# Altium PCB Upper.PcbDoc
Units mm, origin at the board's own origin, x right, y up, seen from the top; angles counter-clockwise.
Board outline 50 x 40 mm, 4 copper layers (Top Layer, GND02, PWR03, Bottom Layer), stack 0.603 mm thick; 43 components, 24 nets, 95 pads, 27 vias.
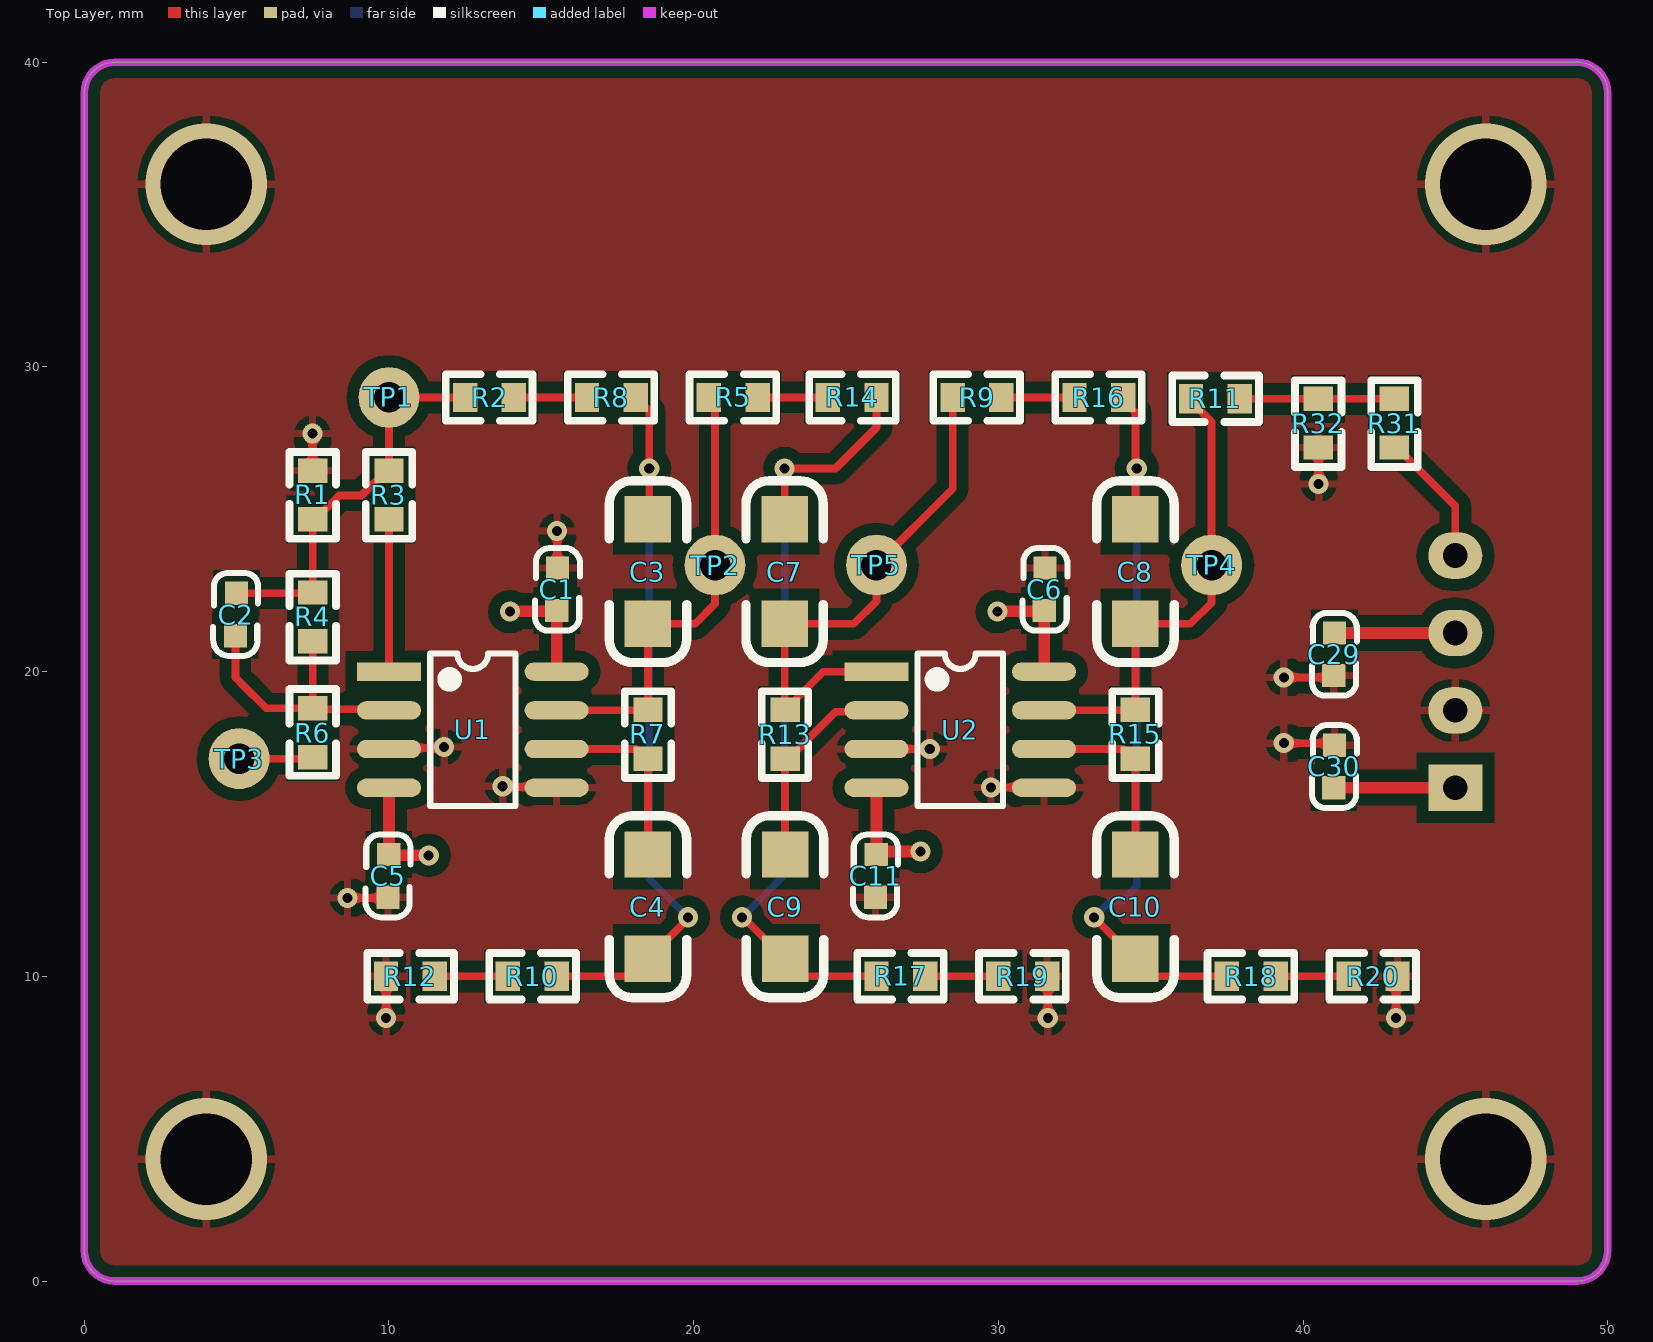
[diagram p0: Top Layer view]
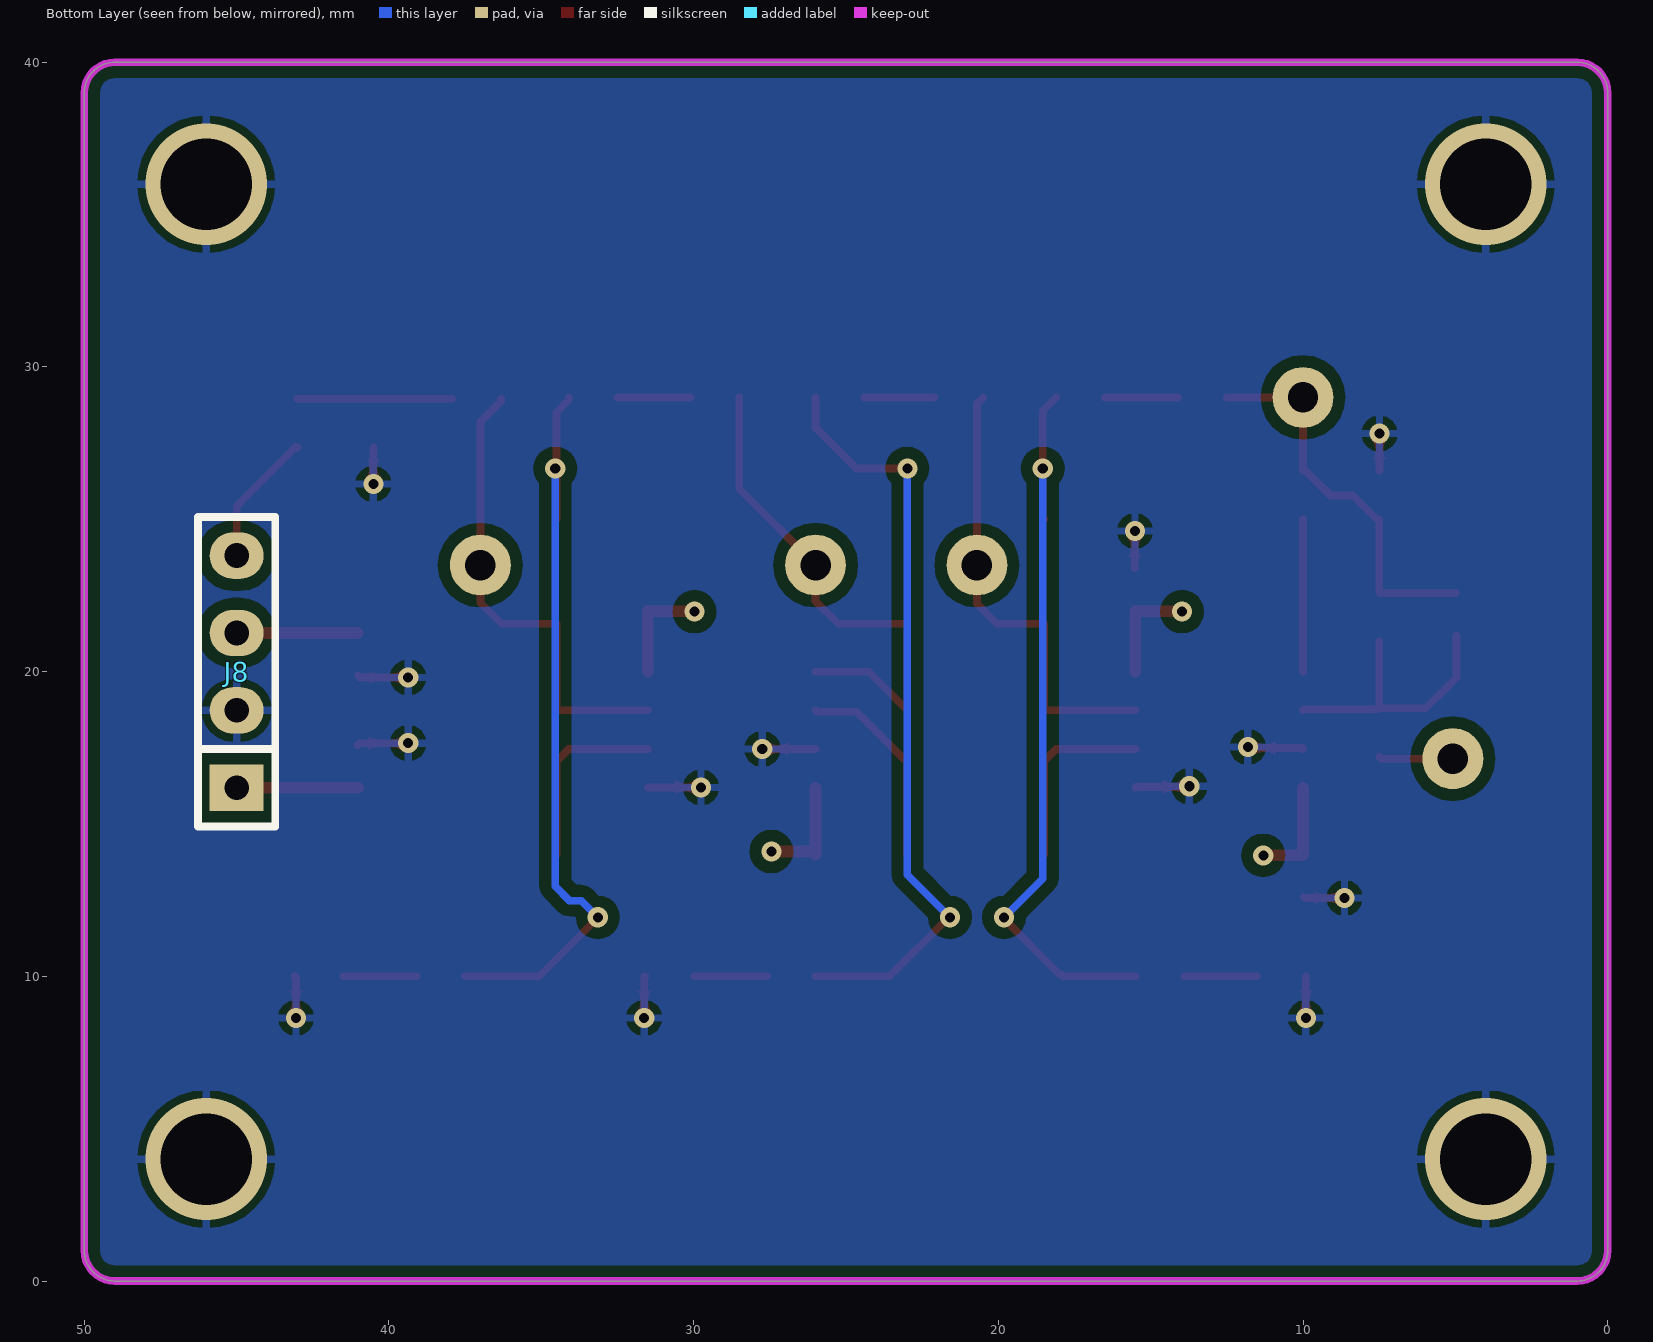
[diagram p1: Bottom Layer view, seen from below]
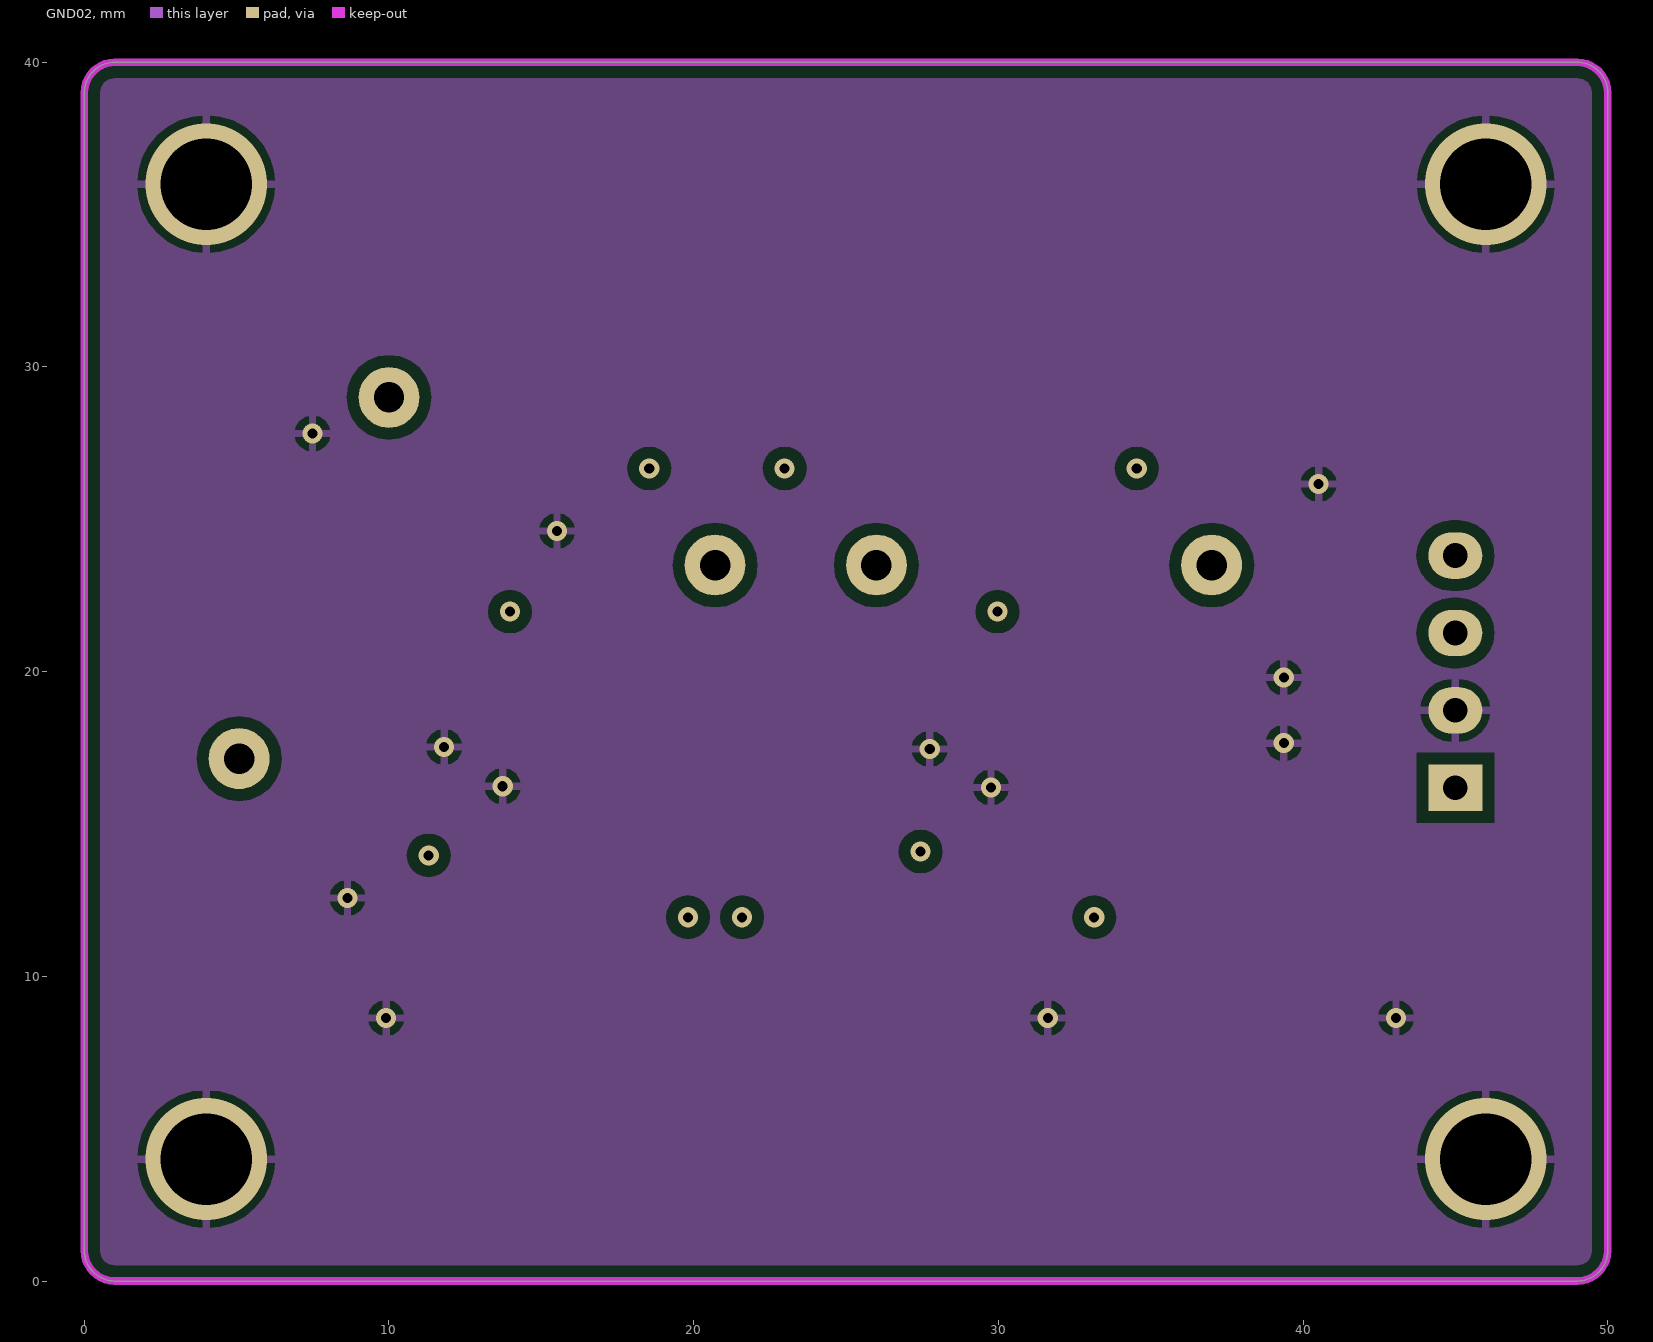
[diagram p2: GND02]
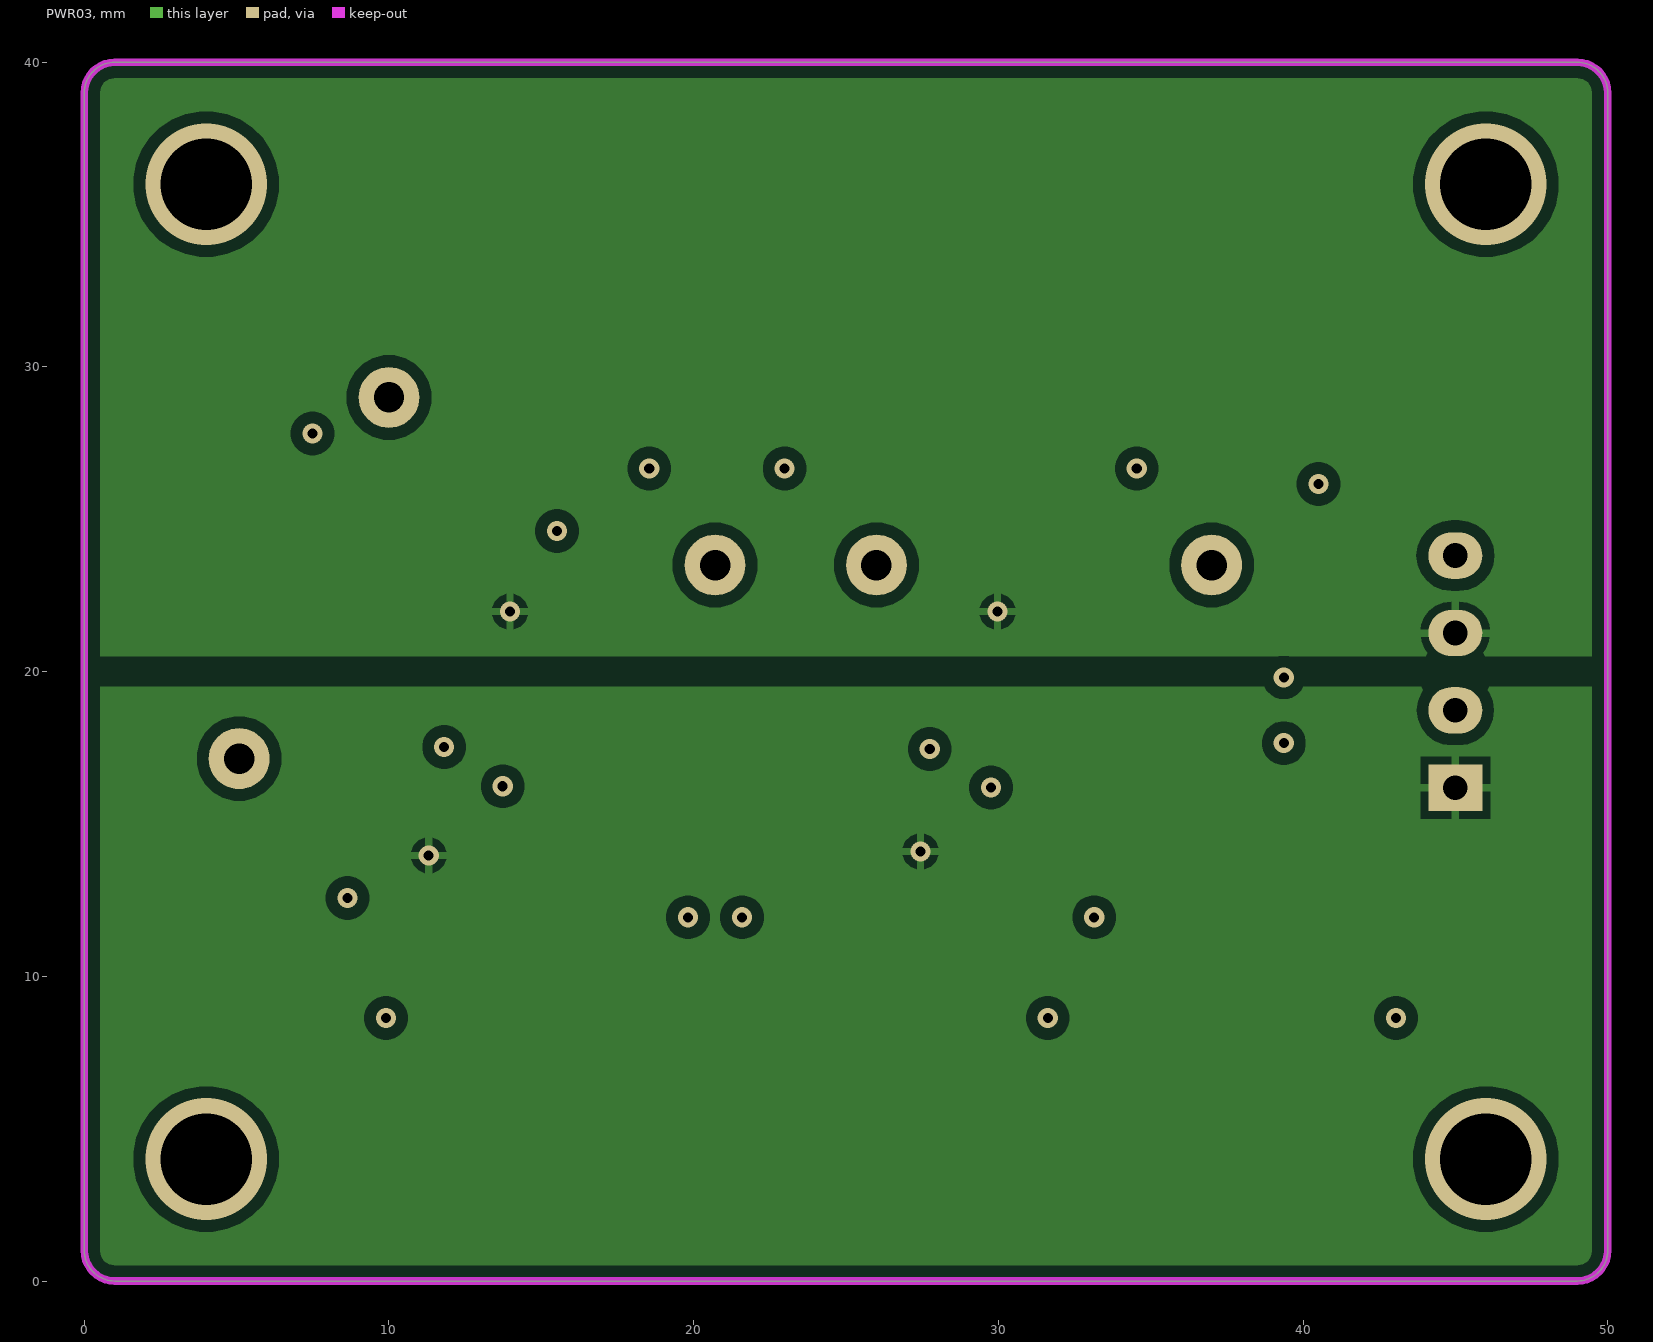
[diagram p3: PWR03]
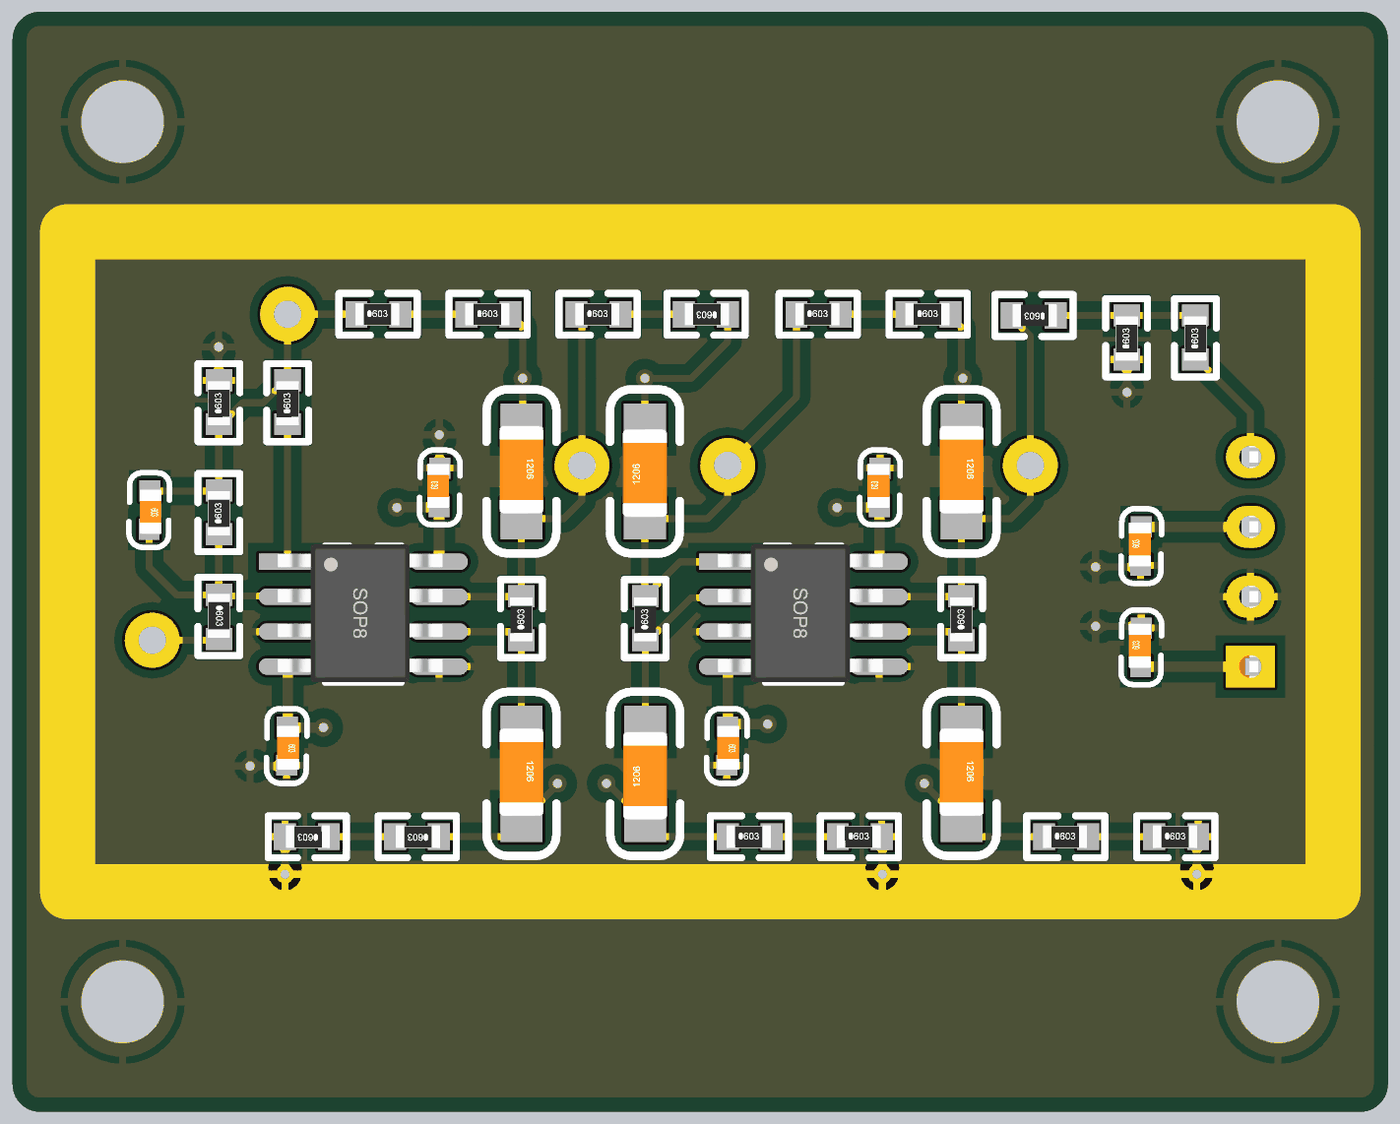
[diagram p4: 3D render of the assembled board from above, using the file's embedded part models]

## Layer stack, top to bottom
Top Solder: solder mask 0.0102, Solder Resist, Dk 3.5
Top Layer: signal copper 0.0356
Dielectric 2: prepreg 0.0711, PP-006, Dk 4.1
GND02: signal copper 0.035
Dielectric 1: dielectric 0.32, FR-4, Dk 4.8
PWR03: signal copper 0.035
Dielectric 3: prepreg 0.0711, PP-006, Dk 4.1
Bottom Layer: signal copper 0.0356
Bottom Solder: solder mask 0.0102, Solder Resist, Dk 3.5

## Board outline
0,1 0,39 cw(c1,39) 1,40 49,40 cw(c49,39) 50,39 50,1 cw(c49,1) 49,0 1,0 cw(c1,1)

## Design rules (kind name [scope] priority, off if disabled: settings)
Clearance [All] p1: gap=0.254 ignorepadtopadclearanceinfootprint=FALSE except(0: Arc-Hole Track-Hole SMDPad-Hole THPad-Hole Via-Hole Fill-Hole Poly-Hole Region-Hole Text-Hole; 0.381: Arc-Fill Arc-Poly Arc-Region Track-Fill Track-Poly Track-Region SMDPad-Fill SMDPad-Poly SMDPad-Region THPad-Fill THPad-Poly THPad-Region Via-Fill Via-Poly Via-Region Fill-Fill Fill-Poly Fill-Region Poly-Poly Poly-Region Region-Region)
DiffPairsRouting [All] p1: maxlimit=2.54 minlimit=0.089 mostfreqgap=0.254 toplayer_minwidth=0.089 toplayer_maxwidth=2.54 toplayer_prefwidth=0.254 midlayer1_minwidth=0.089 midlayer1_maxwidth=2.54 midlayer1_prefwidth=0.254 midlayer2_minwidth=0.089 midlayer2_maxwidth=2.54 midlayer2_prefwidth=0.254 bottomlayer_minwidth=0.089 bottomlayer_maxwidth=2.54 bottomlayer_prefwidth=0.254 maxuncoupledlength=12.7
HoleSize [All] p1: absolutevalues=TRUE maxlimit=30 minlimit=0.3 maxpercent=80.000 minpercent=20.000
PolygonConnect [All] p1: connectstyle=Relief reliefconductorwidth=0.254 reliefentries=4 polygonreliefangle="90 Angle" airgapwidth=0.254
RoutingVias [All] p1: holewidth=0.711 width=1.27 viastyle="Through Hole" minholewidth=0.3 minwidth=0.5 maxholewidth=3 maxwidth=5
SilkToSolderMaskClearance [IsPad] p1: minsilkscreentomaskgap=0 clearancetoexposedcopper=TRUE
SolderMaskExpansion [All] p1: expansion=0.102 istentingtop=FALSE
Width [All] p1: maxlimit=2.54 minlimit=0.089 preferedwidth=0.254
27 further rules are at their usual default settings.

## Components (designator, comment, footprint, x,y, rotation, side; value= is the part's Value field where it differs from the comment)
C1 "0.1uF" 0603C 15.5,22 r90 top
C2 "100pF" 0603C 5,22.58 r270 top
C3 "1uF" 1206C 18.5,25 r270 top
C4 "1uF" 1206C 18.5,14 r270 top
C5 "0.1uF" 0603C 10,14 r270 top locked
C6 "0.1uF" 0603C 31.5,22 r90 top
C7 "1uF" 1206C 22.987,21.571 r90 top
C8 "1uF" 1206C 34.5,25 r270 top
C9 "1uF" 1206C 23,10.571 r90 top
C10 "1uF" 1206C 34.5,14 r270 top
C11 "0.1uF" 0603C 26,14 r270 top
C29 "0.1uF" 0603C 41,19.868 r90 top
C30 "0.1uF" 0603C 41,16.185 r90 top
J8 "Female HDR1X4" Fe-HDR1X4/2.54-S 45,16.19 r0 bottom locked
R1 "10K" 0603R 7.5,25 r90 top
R2 "0R" 0603R 12.5,29 r0 top
R3 "10K" 0603R 10,25 r90 top
R4 "10M" 0603R 7.5,21 r90 top
R5 "0R" 0603R 20.5,29 r0 top
R6 "0R" 0603R 7.5,18.796 r270 top
R7 "300K" 0603R 18.5,17.145 r90 top
R8 "3K" 0603R 16.5,29 r0 top
R9 "0R" 0603R 28.5,29 r0 top
R10 "150R" 0603R 15.5,10 r180 top
R11 "9K" 0603R 37.922,28.956 r180 top
R12 "70R" 0603R 11.5,10 r180 top
R13 "390K" 0603R 23,17.145 r90 top
R14 "30K" 0603R 26,29 r180 top
R15 "360K" 0603R 34.5,17.145 r90 top
R16 "27K" 0603R 32.5,29 r0 top
R17 "150R" 0603R 26,10 r0 top
R18 "100R" 0603R 37.5,10 r0 top
R19 "30R" 0603R 30,10 r0 top
R20 "60R" 0603R 41.5,10 r0 top
R31 "0R" 0603R 43,27.356 r90 top
R32 "1K" 0603R 40.5,27.356 r90 top
TP1 "测试点" TP 10,29 r0 top
TP2 "测试点" TP 20.701,23.5 r90 top
TP3 "测试点" TP 5.08,17.145 r90 top
TP4 "测试点" TP 37,23.5 r90 top
TP5 "测试点" TP 26,23.5 r90 top
U1 "OPA2140" SOP8 10,20 r0 top locked
U2 "OPA2140" SOP8 26,20 r0 top

## Footprints (in the part's own frame and the unit in brackets; to place one, negate y for a bottom-side part, rotate by r counter-clockwise, add the part's x,y. Pads: shape width x height; smd on the part's side, far side on the other; paste and mask are expansions set on the pad)
0603C [mil]
  rect 30x30 smd: 1(0.21,-0.35) 2(55.21,-1.35)
  silkscreen extent -26,-30 81,28, body extent -1,-15 62,17, height 12
0603R [mm]
  rect 0.8x0.965 smd: 1(0,0) 2(1.6,0)
  silkscreen extent -0.64,-0.76 2.21,0.76, body extent -0.04,-0.41 1.56,0.41, height 0.45
1206C [mil]
  rect 60x60 smd: 1(0,0) 2(135,0)
  silkscreen extent -50,-50 185,50, body extent 2,-31 128,32, height 39
Fe-HDR1X4/2.54-S [mil]
  rect 70x60 hole 32: 1(0,0)
  oval 70x60 hole 32: 2(0,-100) 3(0,-200) 4(0,-300)
  silkscreen extent -50,-350 50,50, body extent -44,-355 54,55, height 335
SOP8 [mm]
  rect 2.1x0.6 smd: 1(0,0)
  oval 2.1x0.6 smd: 2(0,-1.27) 3(0,-2.54) 4(0,-3.81) 5(5.5,-3.81) 6(5.5,-2.54) 7(5.5,-1.27) 8(5.5,0)
  silkscreen extent 1.35,-4.41 4.15,0.6, body extent -0.36,-4.37 5.64,0.63, height 1.9
TP [mm]
  round 2 hole 1: 1(0,0)

## Part data
C1 C2 C3 C4 C5 C6 C7 C8 C9 C10 C11 C29 C30: library part CAP, "无极性电容"
R1 R2 R3 R4 R5 R6 R7 R8 R9 R10 R11 R12 R13 R14 R15 R16 R17 R18 R19 R20 R31 R32: library part RES
U1 U2: library part NE5532

## Via types
v1: diameter 0.66, hole 0.33, Top Layer to Bottom Layer, 23 vias
v2: diameter 4, hole 3, Top Layer to Bottom Layer, 4 vias

## Nets (pads, with @x,y where several pads share a name; then routed paths per layer and width w, separated by ;. In a path a pad name is that pad's centre, name@x,y a point inside that pad or via, vN(x,y) a via of type N, cw(c..) or ccw(c..) an arc to the next point about the centre after c; other vN are vias at no path point)
+12V: C1.1 C6.1 C29.2 J8.3 U1.8 U2.8 | length 11.1
  Top Layer w0.381: v1(13.97,21.971) 13.987,21.988 15.492,21.988 C1.1 15.509,20.009 U1.8 ; v1(29.972,21.971) 29.989,21.988 31.492,21.988 C6.1 31.509,20.101 31.5,20.092 U2.8 ; C29.2 J8.3
-12V: C5.1 C11.1 C30.1 J8.1 U1.4 U2.4 | length 11.2
  Top Layer w0.381: U1.4 10,14.004 C5.1 10.016,13.97 v1(11.303,13.97) ; C11.1 C11.1@26,14.004 ; U2.4 C11.1@26,14.004 ; v1(27.448,14.097) 26.093,14.097 C11.1@26,14.004 ; C30.1 J8.1
BPF1_IN: R2.2 R8.1 | length 2.4
  Top Layer w0.254: R2.2 R8.1
BPF1_OUT: C3.2 R5.1 R7.2 TP2.1 U1.7 | length 15.2
  Top Layer w0.254: U1.7 18.485,18.73 R7.2 ; R7.2@18.525,18.77 R7.2 ; R5.1 20.701,28.799 TP2.1 20.701,22.225 20.047,21.571 C3.2 R7.2
BPF2_IN: R5.2 R14.2 | length 2.3
  Top Layer w0.254: R5.2 R14.2
BPF2_OUT: C7.1 R9.1 R13.2 TP5.1 U2.1 | length 17.4
  Top Layer w0.254: U2.1 24.255,20 R13.2 22.987,18.758 C7.1 25.254,21.571 26,22.317 TP5.1 28.5,26 R9.1
BPF3_IN: R9.2 R16.1 | length 2.4
  Top Layer w0.254: R9.2 R16.1
BPF3_OUT: C8.2 R11.2 R15.2 TP4.1 U2.7 | length 15.6
  Top Layer w0.254: U2.7 34.485,18.73 R15.2 C8.2 36.303,21.571 37,22.268 TP4.1 37,28.196 36.322,28.874 R11.2
BPF_OUT: J8.4 R31.1 | length 4.4
  Top Layer w0.254: R31.1 43.082,27.356 45,25.439 J8.4
GND: C1.2 C5.2 C6.2 C11.2 C29.1 C30.2 J8.2 R1.2 R12.2 R19.2 R20.2 R32.1 U1.3 U1.5 U2.3 U2.5 | length 19.6
  Top Layer w0.254: v1(7.493,27.813) 7.493,26.607 R1.2 ; v1(8.636,12.573) 9.941,12.573 C5.2 ; R12.2 9.906,9.994 v1(9.906,8.636) ; U1.3 10.033,17.493 11.778,17.493 v1(11.811,17.526) ; v1(13.732,16.24) 13.757,16.215 15.475,16.215 U1.5 ; v1(15.514,24.618) 15.524,24.608 15.524,23.412 C1.2 ; U2.3 26.002,17.462 v1(27.748,17.464) v1(27.748,17.464) ; v1(29.756,16.201) 29.762,16.196 31.494,16.196 U2.5 ; R19.2 31.623,9.977 v1(31.623,8.636) ; v1(39.37,17.653) 40.968,17.653 C30.2 ; v1(39.37,19.812) 40.948,19.812 C29.1 ; R32.1 40.513,27.343 v1(40.513,26.162) ; v1(43.053,8.636) 43.053,9.953 R20.2
  other v2: 4,4 46,4 4,36 46,36
IV_IN: R6.2 TP3.1 | length 2.4
  Top Layer w0.254: TP3.1 7.449,17.145 R6.2
IV_OUT: C2.1 R1.1 R2.1 R3.2 R4.2 TP1.1 | length 13
  Top Layer w0.254: C2.1 7.475,22.575 R4.2 R1.1 7.582,25 8.363,25.781 9.099,25.781 9.918,26.6 R3.2 TP1.1 R2.1
NetC2_2: C2.2 R4.1 R6.1 U1.2 | length 9.1
  Top Layer w0.254: C2.2 4.966,19.799 5.207,19.558 5.969,18.796 R6.1 ; R4.1 R6.1 ; U1.2 9.967,18.763 7.533,18.763 R6.1
NetC3_1: C3.1 C4.2 R8.2 R10.1 | length 24.6
  Top Layer w0.254: R10.1 17.874,10 17.929,10.055 17.984,10.055 19.812,11.883 v1(19.812,11.938) ; R8.2 18.542,28.558 v1(18.542,26.67) 18.542,25.042 C3.1
  Bottom Layer w0.254: v1(18.542,26.67) 18.542,13.208 v1(19.812,11.938)
NetC4_1: C4.1 R7.1 U1.6 | length 6.3
  Top Layer w0.254: U1.6 18.103,17.46 18.418,17.145 R7.1 C4.1
NetC7_2: C7.2 C9.1 R14.1 R17.1 | length 26.7
  Top Layer w0.254: v1(21.59,11.938) 21.633,11.938 23.571,10 R17.1 ; C7.2 v1(22.987,26.67) 24.657,26.67 26,28.013 R14.1
  Bottom Layer w0.254: v1(21.59,11.938) 22.987,13.335 v1(22.987,26.67)
NetC8_1: C8.1 C10.2 R16.2 R18.1 | length 24.8
  Top Layer w0.254: v1(33.147,11.938) 33.147,11.924 C10.2 ; R16.2 34.1,28.918 34.5,28.517 C8.1 ; C10.2@34.544,10.527 35.071,10 R18.1
  Bottom Layer w0.254: v1(33.147,11.938) 33.694,12.485 34.075,12.485 34.544,12.954 v1(34.544,26.67)
NetC9_2: C9.2 R13.1 U2.2 | length 6.8
  Top Layer w0.254: C9.2 R13.1 23.114,17.145 24.657,18.688 25.958,18.688 U2.2
NetC10_1: C10.1 R15.1 U2.6 | length 6.3
  Top Layer w0.254: U2.6 34.102,17.46 34.418,17.145 R15.1 C10.1
NetR3_1: R3.1 U1.1 | length 5
  Top Layer w0.254: U1.1 R3.1
NetR10_2: R10.2 R12.1 | length 2.4
  Top Layer w0.254: R12.1 R10.2
NetR11_1: R11.1 R31.2 R32.2 | length 5.1
  Top Layer w0.254: R11.1 R32.2 R31.2
NetR17_2: R17.2 R19.1 | length 2.4
  Top Layer w0.254: R17.2 R19.1
NetR18_2: R18.2 R20.1 | length 2.4
  Top Layer w0.254: R18.2 R20.1

## Polygon pours and split planes (outlines as drawn)
-12V on PWR03 "-12V_L03_P007" (solid, pour order 7): 0,0 50,0 50,19.5 0,19.5
+12V on PWR03 "+12V_L03_P008" (solid, pour order 8): 0,40 50,40 50,20.5 0,20.5
GND on GND02 "GND_L02_P005" (solid, pour order 5): 0,1 0,39 cw(c1,39) 1,40 49,40 cw(c49,39) 50,39 50,1 cw(c49,1) 49,0 1,0 cw(c1,1)
GND on Top Layer "GND_L01_P004" (solid, pour order 4): 0,1 0,39 cw(c1,39) 1,40 49,40 cw(c49,39) 50,39 50,1 cw(c49,1) 49,0 1,0 cw(c1,1)
GND on Bottom Layer "GND_L04_P006" (solid, pour order 6): 0,1 0,39 cw(c1,39) 1,40 49,40 cw(c49,39) 50,39 50,1 cw(c49,1) 49,0 1,0 cw(c1,1)

## Keep-outs
Keep-Out Layer:
  the board outline again, w0.254

## Silkscreen, mask and mechanical layers (free items; w line width, h text height)
Top Solder:
  lines w2: 2,8 48,8 48,32 2,32 2,8